# EAGLE board LCD (EAGLE 7.2.0)
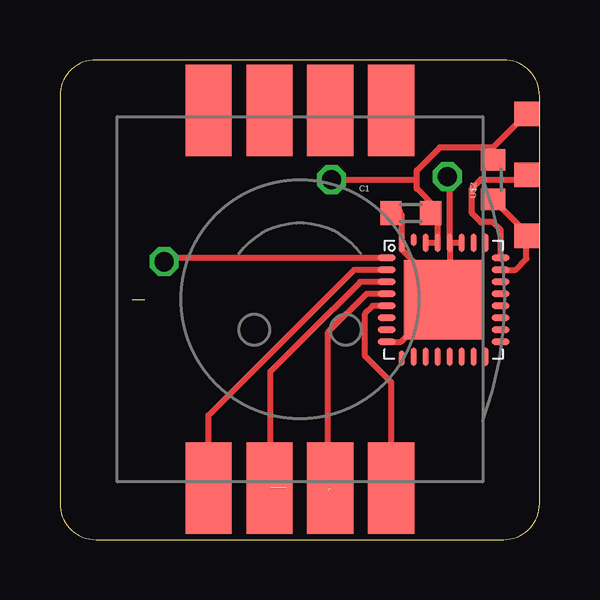
[diagram p0: board, top side]
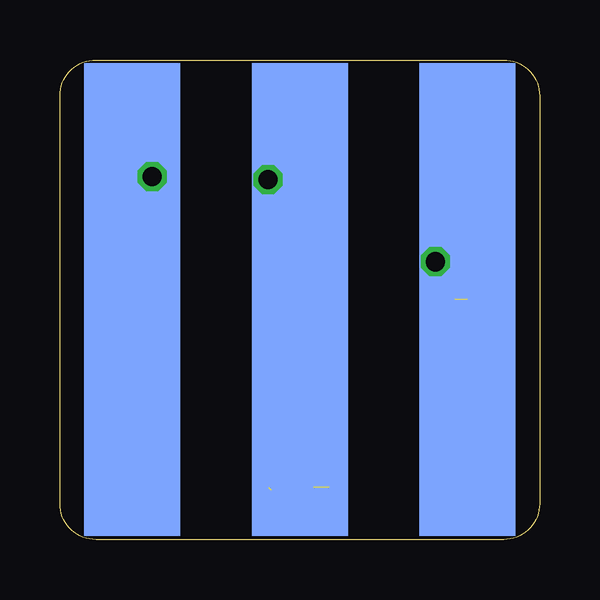
[diagram p1: board, bottom side, seen from below]

Size 20 x 20 mm. Coordinates in mm from the lower left corner, seen from the top.
Copper layers (1*16): Top 0.035mm / dielectric 1.5mm / Bottom 0.035mm
Design rules "Bilex DRU *": minimum track width 10mil, minimum drill 24mil, track to track 10mil, track to pad 10mil, pad to pad 10mil, via to via 10mil, smd to smd 10mil, copper to edge 1mil, drill to drill 8mil, minimum pad ring 10mil, minimum via ring 8mil, stop-mask expansion 4mil, vias tented up to drill 0mil, thermal gap 10mil

## Footprints (pad centres in the part's own frame; a part is rotated, then mirrored left to right if it is on the bottom)
603 = smd 0.889 x 1.016: 1 -0.826,0; 2 0.826,0
CARRIER_SMD2_WIDE_3POL = smd 4 x 19.7 bottom: GND -6.985,3.493; RX/TX 6.985,3.493; VCC 0,3.493 | smd 1.016 x 1.016: RST -9.461,0.826; TST -9.461,-1.714; VCC'' -9.461,-4.255
SMILEY = smd 1.93 x 3.81: 1 -6.35,10.414; 2 -3.81,10.414; 3 -1.27,10.414; 4 1.27,10.414; 5 1.27,-5.334; 6 -1.27,-5.334; 7 -3.81,-5.334; 8 -6.35,-5.334
QFN32 = smd 0.762 x 0.254: 1 -2.375,1.75; 2 -2.375,1.25; 3 -2.375,0.75; 4 -2.375,0.25; 5 -2.375,-0.25; 6 -2.375,-0.75; 7 -2.375,-1.25; 8 -2.375,-1.75; 17 2.375,-1.75; 18 2.375,-1.25; 19 2.375,-0.75; 20 2.375,-0.25; 21 2.375,0.25; 22 2.375,0.75; 23 2.375,1.25; 24 2.375,1.75 | smd 0.254 x 0.635: 9 -1.75,-2.438 | smd 0.254 x 0.762: 10 -1.25,-2.375; 11 -0.75,-2.375; 12 -0.25,-2.375; 13 0.25,-2.375; 14 0.75,-2.375; 15 1.25,-2.375; 16 1.75,-2.375; 25 1.75,2.375; 26 1.25,2.375; 27 0.75,2.375; 28 0.25,2.375; 29 -0.25,2.375; 30 -0.75,2.375; 32 -1.75,2.375 | smd 0.254 x 0.508: 31 -1.25,2.5 | smd 3.302 x 3.302: TP 0,0

## Placement (x,y rotation side)
C1  100n  [603]  14.63,13.62 180 top
U$1  CARRIER_SMD2SMD2_3POL_W  [CARRIER_SMD2_WIDE_3POL]  10,13.5 180 top
U$2  10k  [603]  18.06,15.01 90 top
U$3  SMILEY  [SMILEY]  7.47,12.56 180 top
U$10  MSP430G2553  [QFN32]  16,10 0 top

## Library data of the parts
C1 U$1-U$3 U$10 = thar

## Nets
GND: C1.2 U$1.GND U$10.8 U$10.27 U$10.28 U$10.32 U$10.TP
N$2: U$3.1 U$10.5
N$3: U$1.TST U$10.24
N$4: U$1.RST U$2.1 U$10.23
N$5: U$3.2 U$10.4
N$6: U$3.3 U$10.3
N$7: U$3.4 U$10.2
N$12: U$1.RX/TX U$10.1
VCC: C1.1 U$1.VCC U$1.VCC'' U$2.2 U$10.29 U$10.30

## Tracks (layer width: path | path; a pad name or v marks a point on that pad's centre or on a via)
GND  (via drill 0.8)
  Top 0.254: 14.15,13.46 C1.2 | U$10.28 16.25,10.25 U$10.TP | U$10.27 U$10.28 | U$10.TP 16.07,9.93 16.79,9.93 15.64,11.08 15.26,11.08 14.25,12.09 U$10.32 14.25,13.55 C1.2 | U$10.8 14.21,8.25 15.39,9.43 15.43,9.43 U$10.TP | C1.2 14.18,13.68 14.12,13.74 14.12,13.87 | U$10.28 16.25,15.04 v16.15,15.14
  Bottom 0.254: v16.15,15.14 17.93,13.56 18,13.5 | v16.15,15.14 18,17.1 U$1.GND 16.98,18 v16.15,15.14
N$2
  Top 0.254: U$3.1 13.82,6.56 12.72,7.65 12.72,9.43 13.05,9.75 U$10.5
N$3
  Top 0.254: U$10.24 18.38,12.92 18.06,13.24 17.55,13.24 17.17,13.62 17.17,14.63 17.55,15.01 19.26,15.01 U$1.TST
N$4
  Top 0.254: U$10.23 18.99,11.25 19.45,11.71 U$1.RST 19.46,12.79 U$2.1
N$5  (1 unrouted)
  Top 0.254: U$10.4 12.79,10.25 11.19,8.65 11.19,2.06
N$6  (1 unrouted)
  Top 0.254: U$10.3 12.52,10.75 10.25,8.47 9.55,7.78 8.77,7 8.77,2.19 U$3.3 | 9.55,2.31 9.42,2.19
N$7
  Top 0.254: U$10.2 12.26,11.25 6.2,5.18 U$3.4
N$12  (via drill 0.8)  (1 unrouted)
  Top 0.254: U$10.1 4.43,11.75 4.34,11.71 v4.34,11.59
  Bottom 0.254: 4.03,11.98 v4.34,11.59 3.52,10
VCC  (via drill 0.8)
  Top 0.254: 19.5,17.52 19.46,17.56 | 19.2,17.56 19.2,17.51 | 19.2,17.51 19.46,17.56 | 19.65,17.95 19.65,17.82 | 19.65,17.82 19.65,17.75 19.46,17.56 | 19.65,17.82 19.59,17.75 U$1.VCC'' 18.06,16.35 | 19.2,17.51 19.2,17.69 19.59,18.07 19.08,18.07 | C1.1 15.52,13.56 15.46,13.69 15.26,13.62 15.39,13.62 15.64,13.74 | U$10.30 U$10.29 15.75,13.53 C1.1 | U$2.2 18.06,16.35 | C1.1 15.64,13.62 15.64,13.87 14.88,14.63 14.88,15.01 | 14.88,15.01 14.88,15.39 15.84,16.35 18.06,16.35 | v11.33,15.01 14.88,15.01
  Bottom 0.254: U$1.VCC 10,13.69 v11.33,15.01